# EAGLE board Nanobuino (EAGLE 6.5.0)

Size 70.1 x 70.1 mm. Coordinates in mm from the lower left corner, seen from the top.
Outline: 0,0 70.1,0 70.1,70.1 0,70.1 0,0
Copper layers (1*16): Top 0.035mm / dielectric 1.5mm / Bottom 0.035mm
Design rules "default": minimum track width 10mil, minimum drill 24mil, track to track 8mil, track to pad 8mil, pad to pad 8mil, via to via 8mil, smd to smd 8mil, copper to edge 40mil, drill to drill 8mil, minimum pad ring 10mil, minimum via ring 8mil, stop-mask expansion 4mil, vias tented up to drill 0mil, thermal gap 10mil

## Footprints (pad centres in the part's own frame; a part is rotated, then mirrored left to right if it is on the bottom)
MSOP10 = smd 0.25 x 1: 1 -1,-2.113; 2 -0.5,-2.113; 3 0,-2.113; 4 0.5,-2.113; 5 1,-2.113; 6 1,2.113; 7 0.5,2.113; 8 0,2.113; 9 -0.5,2.113; 10 -1,2.113
HEAD15-NOSS = drill 0.914 pad 1.778 square: 1 0,0 | drill 0.914 pad 1.778: 2 2.54,0; 3 5.08,0; 4 7.62,0; 5 10.16,0; 6 12.7,0; 7 15.24,0; 8 17.78,0; 9 20.32,0; 10 22.86,0; 11 25.4,0; 12 27.94,0; 13 30.48,0; 14 33.02,0; 15 35.56,0
HEAD15-NOSS-1 = drill 0.914 pad 1.778: 1 0,0; 2 2.54,0; 3 5.08,0; 4 7.62,0; 5 10.16,0; 6 12.7,0; 7 15.24,0; 8 17.78,0; 9 20.32,0; 10 22.86,0; 11 25.4,0; 12 27.94,0; 13 30.48,0; 14 33.02,0; 15 35.56,0
AL60P = drill 1.016 pad 2.54 octagon: 1 -3.759,0; 2 3.759,0
EVQ-Q2 = smd 3.2 x 1.2: A -3.4,-2; A' 3.4,-2; B -3.4,2; B' 3.4,2
SOT23-BEC = smd 1 x 1.4: B -0.95,-1.1; C 0,1.1; E 0.95,-1.1
STX3100 = drill 1.5 pad 2.54: 1 2.7,-0.1 | drill 1.5: 2 7.7,5; 3 7.7,2.3; 4 7.7,-2.5; 5 7.7,-5.2 | hole 1.5: 2.7,4.9; 2.7,-5.1; 7.7,-0.1

## Placement (x,y rotation side)
IC1  MCP73833-UN  [MSOP10]  -6.35,3.17 0 top  (outside the outline)
J1  HEAD15-NOSS  [HEAD15-NOSS]  25.4,38.1 270 top
J2  HEAD15-NOSS-1  [HEAD15-NOSS-1]  44.45,38.1 270 top
SP1  SPEAKER/AL60P  [AL60P]  50.8,53.98 0 top
SW1  SPST_TACT-EVQQ2  [EVQ-Q2]  9.53,34.92 0 top
SW2  SPST_TACT-EVQQ2  [EVQ-Q2]  9.53,15.88 0 top
SW3  SPST_TACT-EVQQ2  [EVQ-Q2]  60.33,12.7 0 top
SW4  SPST_TACT-EVQQ2  [EVQ-Q2]  57.15,25.4 0 top
SW5  SPST_TACT-EVQQ2  [EVQ-Q2]  44.45,38.1 0 top
SW6  SPST_TACT-EVQQ2  [EVQ-Q2]  28.57,38.1 0 top
SW7  SPST_TACT-EVQQ2  [EVQ-Q2]  41.27,25.4 0 top
T1  [SOT23-BEC]  -6.35,-6.35 0 top  (outside the outline)
X1  STEREOJACK  [STX3100]  9.53,57.15 0 top

## Library data of the parts
IC1 SP1 SW1-SW7 X1 = adafruit
J1 J2 = MyCON2
T1 = transistor-neu-to92

## Nets
3V3: J2.14
+5V: J2.4
A0: J2.12
A1: J2.11
A2: J2.10
A3: J2.9
A4: J2.8
A5: J2.7
A6: J2.6
A7: J2.5
AREF: J2.13
COM: J1.4 J2.2
D0/RX: J1.2
D1/TX: J1.1
D2: J1.5
D3: J1.6
D4: J1.7
D5: J1.8
D6: J1.9
D7: J1.10
D8: J1.11
D9: J1.12
D10: J1.13
D11/MOSI: J1.14
D12/MISO: J1.15
D13/SCK: J2.15
GND: IC1.5
RESET: J1.3 J2.3
VDD1: IC1.1
VDD2: IC1.2
VIN: J2.1

## Tracks (layer width: path | path; a pad name or v marks a point on that pad's centre or on a via)
COM  (1 unrouted)
RESET  (1 unrouted)